# Altium PCB Ethernet.PcbDoc
Units mil, origin at the board's own origin, x right, y up, seen from the top; angles counter-clockwise.
Board outline 1020 x 1675 mil, 2 copper layers (Top Layer, Bottom Layer); 17 components, 15 nets, 62 pads, 2 vias.
Unrouted connection lines stored in the file: 1.
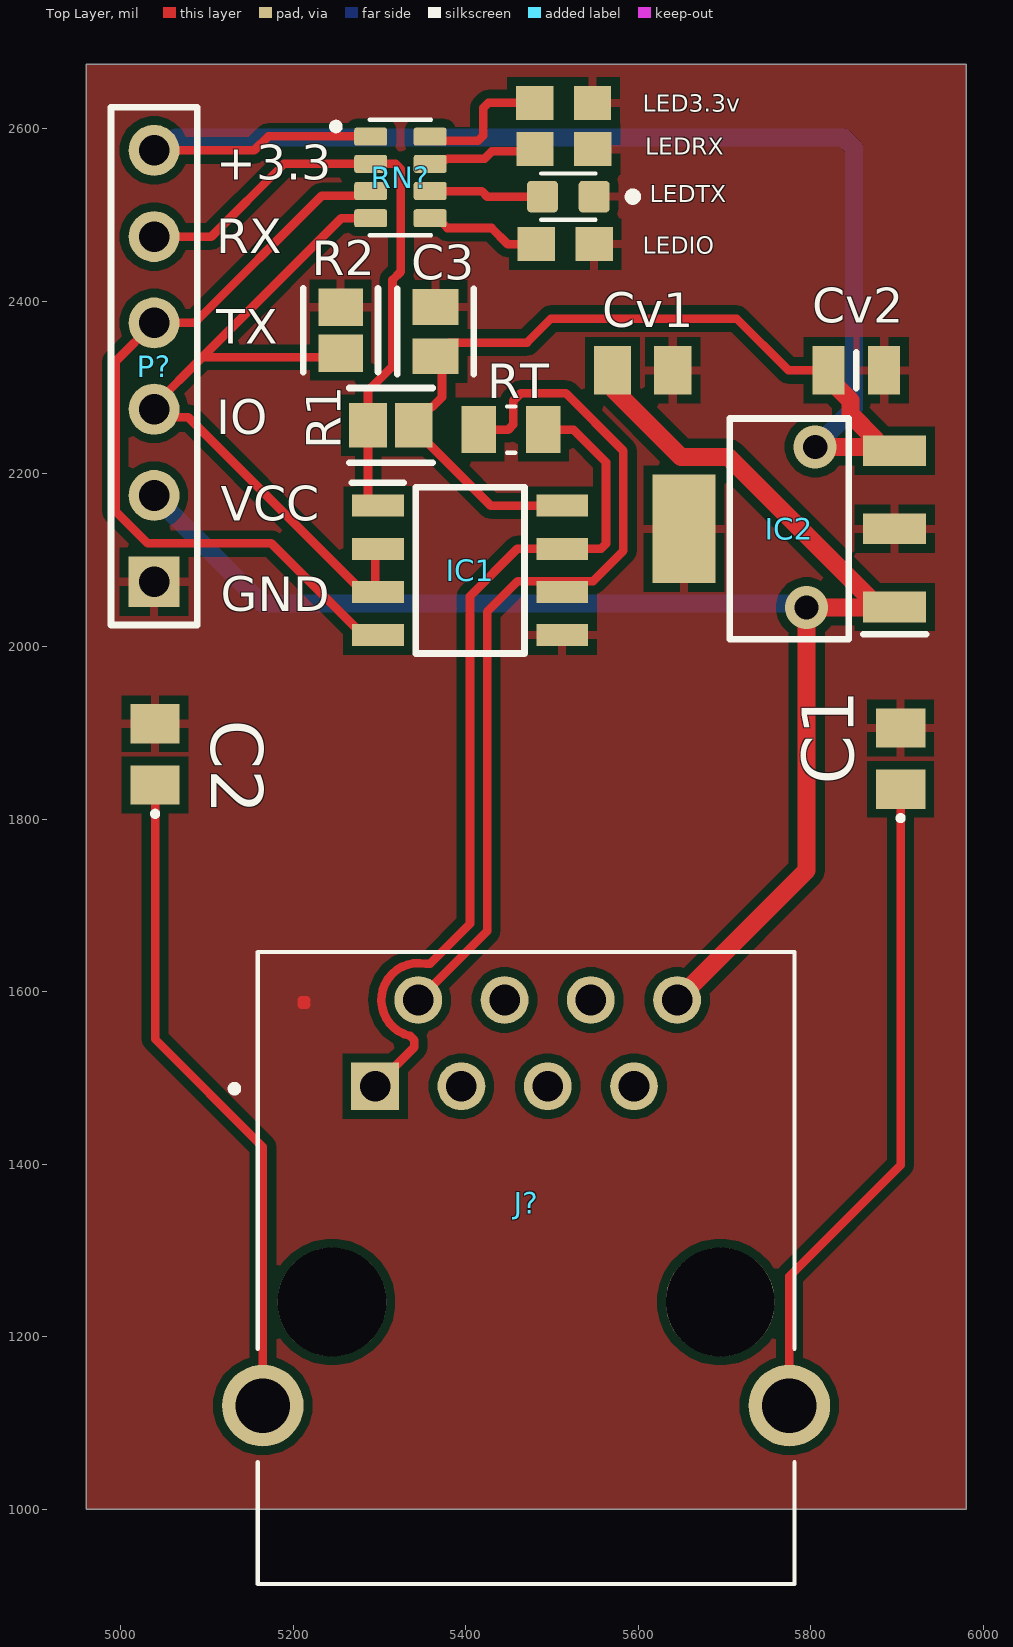
[diagram p0: Top Layer view]
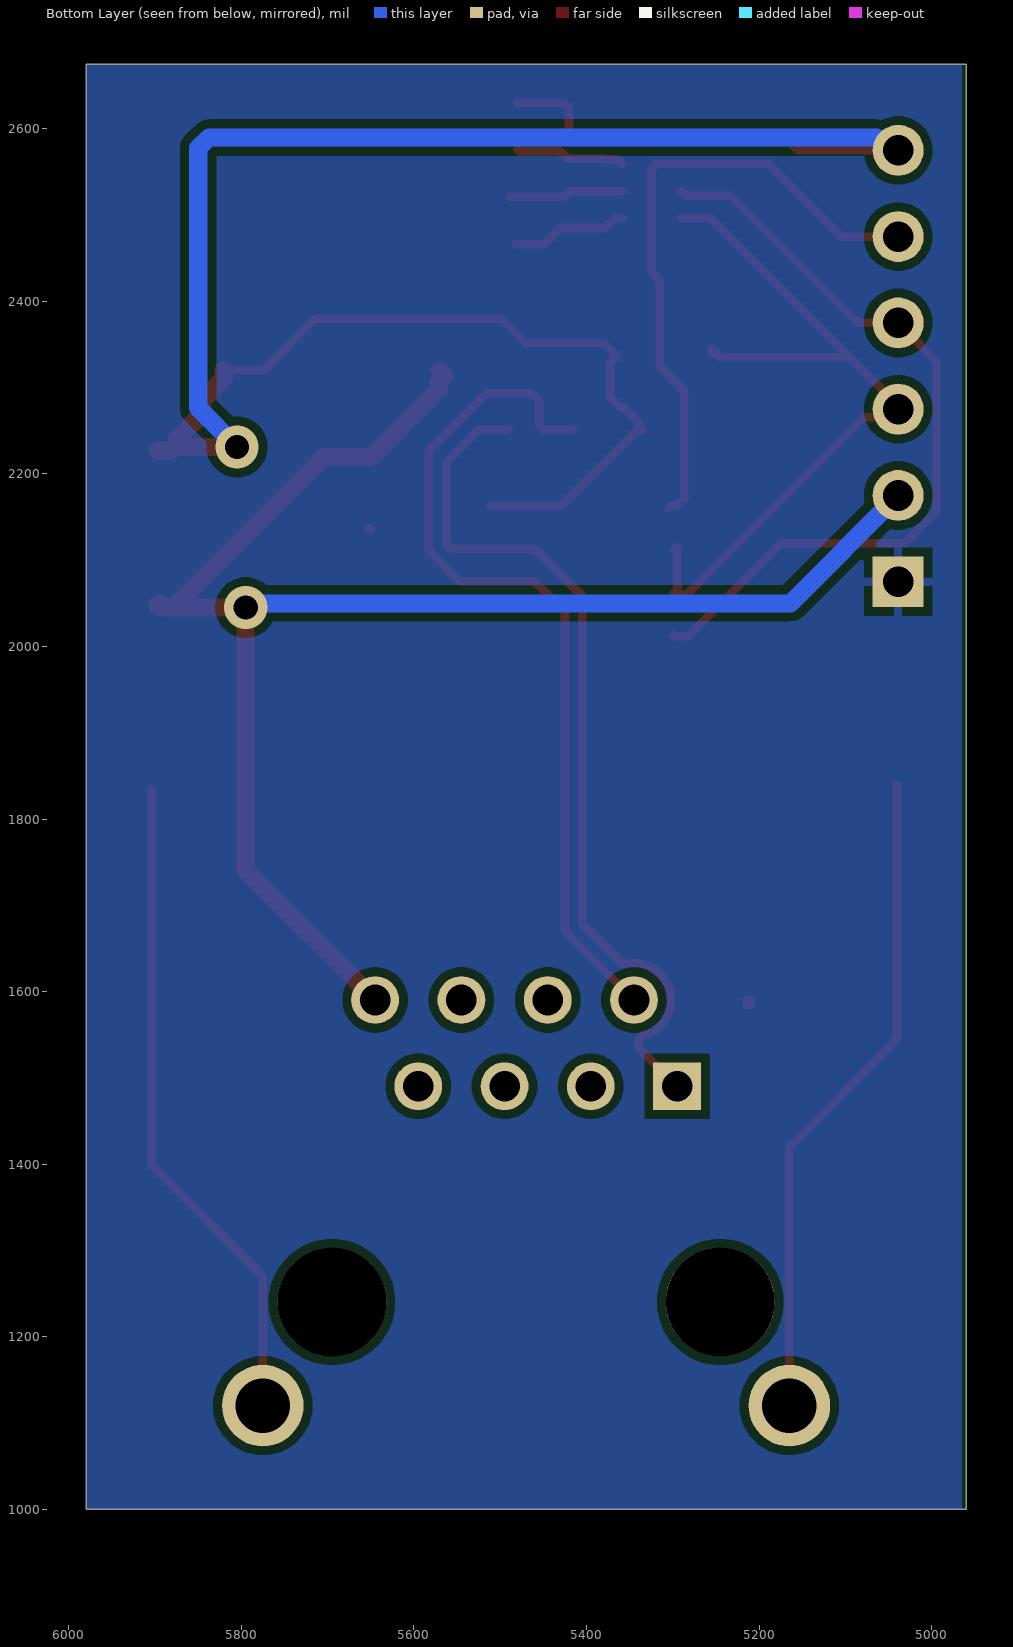
[diagram p1: Bottom Layer view, seen from below]
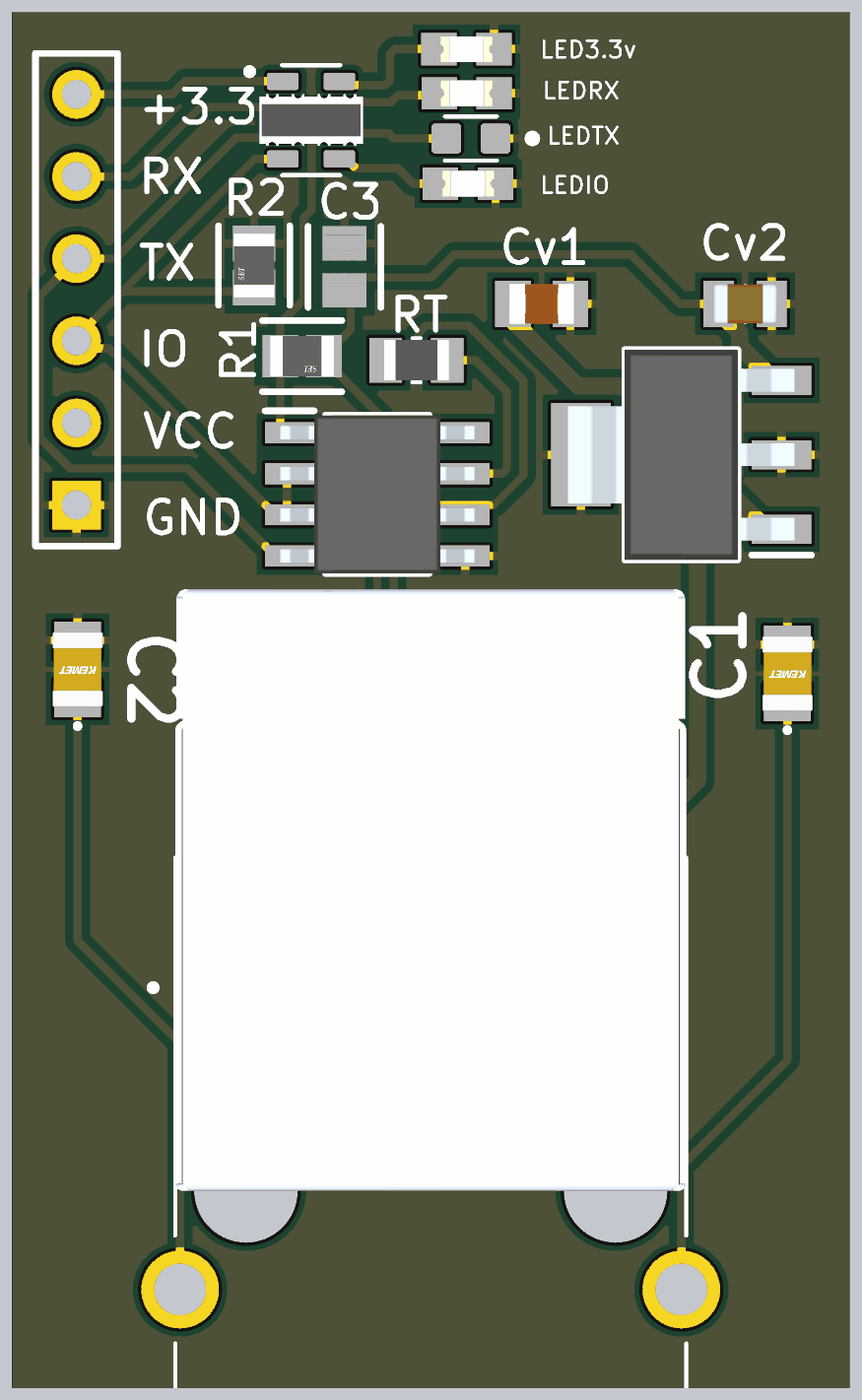
[diagram p2: 3D render of the assembled board from above, using the file's embedded part models]

## Layer stack, top to bottom
Top Solder: solder mask 0.4, Solder Resist, Dk 3.5
Top Layer: signal copper 1.4
Dielectric 1: dielectric 12.6, FR-4, Dk 4.8
Bottom Layer: signal copper 1.4
Bottom Solder: solder mask 0.4, Solder Resist, Dk 3.5

## Board outline
4960,1000 5980,1000 5980,2675 4960,2675

## Design rules (kind name [scope] priority, off if disabled: settings)
Clearance [All] p1: gap=10 ignorepadtopadclearanceinfootprint=FALSE except(0: Arc-Hole Track-Hole SMDPad-Hole THPad-Hole Via-Hole Fill-Hole Poly-Hole Region-Hole Text-Hole)
ComponentClearance [All] p1: gap=0 collisioncheckmode=3 verticalgap=0 showdistances=FALSE
HoleSize [All] p1: absolutevalues=TRUE maxlimit=100 minlimit=10 maxpercent=80.000 minpercent=20.000
PolygonConnect [All] p1: connectstyle=Relief reliefconductorwidth=10 reliefentries=4 polygonreliefangle="90 Angle" airgapwidth=10
RoutingVias [All] p1: holewidth=28 width=50 viastyle="Through Hole" minholewidth=28 minwidth=50 maxholewidth=28 maxwidth=50
SolderMaskExpansion SolderMaskExpansion_Via [IsVia] p1: expansion=4 istentingtop=TRUE
SolderMaskExpansion [All] p2: expansion=4 istentingtop=FALSE
Width [All] p1: maxlimit=21.2 minlimit=10 preferedwidth=10
28 further rules are at their usual default settings.

## Components (designator, comment, footprint, x,y, rotation, side; value= is the part's Value field where it differs from the comment)
C1 "C0805C220J5GAC7210" C0805 5904.07,1870 r90 top
C2 "C0805C220J5GAC7210" C0805 5040,1875 r90 top
C3 "CL21B104KBCNNNC" FP-CL21-IPC_C 5365,2365 r90 top
Cv1 "CL21A106KOQNNNG" CAPC2012X140N#1 5605.04,2320 r0 top value="10 uF"
Cv2 "CL21A226MQQNNNE" CAPC2012X140N#2 5852.72,2320 r180 top value="22 uF"
IC1 "SP3485EN-L" SOIC127P600X175-8N 5405,2088.17 r0 top
IC2 "AZ1117CH2-3.3TRG1" SOT230P700X180-4N 5775,2136.3 r180 top
J? "A-2004-2-4-LPS-N-R" ASSMANN_A-2004-2-4-LPS-N-R 5470,1240.31 r0 top
LED3.3v "LTST-C191KRKT" 0603 5513.46,2630 r180 top value=Red
LEDIO "LTST-C191KSKT" 0603 5515.34,2466.3 r180 top value=Yellow
LEDRX "LTST-C191KGKT" 0603 5513.81,2576.3 r180 top value=Green
LEDTX "LTST-C191TBKT" LEDC1608X65N 5518.89,2521.3 r180 top value=Blue
P? "Header 6" HDR1X6 5038.81,2075 r90 top
R1 "RNCP0805FTD10K0" FP-RNCP0805-IPC_C 5313.37,2256.3 r180 top
R2 "RNCP0805FTD10K0" FP-RNCP0805-IPC_C 5255,2366.63 r90 top
RN? "CAY16-2201F4LF" RESCAF80P320X160X60-8N 5324.36,2543.55 r0 top
RT "RMCF0805JT120R" RESC2012X65N 5452.6,2251.3 r0 top value="120 Ohm"

## Footprints (in the part's own frame and the unit in brackets; to place one, negate y for a bottom-side part, rotate by r counter-clockwise, add the part's x,y. Pads: shape width x height; smd on the part's side, far side on the other; paste and mask are expansions set on the pad)
0603 [mm]
  rect 1.1x1 smd: 1(-0.85,0) 2(0.85,0)
  body extent -0.8,-0.4 0.8,0.4, height 0.55
ASSMANN_A-2004-2-4-LPS-N-R [mm]
  rect 1.408x1.408 hole 0.9: 1(-4.445,6.35)
  round 1.408 hole 0.9: 2(-3.175,8.89) 3(-1.905,6.35) 4(-0.635,8.89) 5(0.635,6.35) 6(1.905,8.89) 7(3.175,6.35) 8(4.445,8.89)
  round 2.4 hole 1.6: S1(-7.75,-3.05) S2(7.75,-3.05)
  round 3.2 hole 3.2 unplated: ""(-5.715,0) ""(5.715,0)
  silkscreen extent -8.69,-8.3 7.9,10.3, body extent -7.9,0 7.9,18.6, height 6.6
C0805 [mm]
  rect 1.15x1.45 smd: 1(-0.9,0) 2(0.9,0)
  silkscreen extent -1.8,-0.05 -1.7,0.05, body extent -1.15,-0.78 1.15,0.77, height 0.98
CAPC2012X140N#1 [mm]
  rect 1.1x1.43 smd: 1(-0.888,0) 2(0.888,0)
  body extent -1,-0.63 1,0.63, height 1.35
CAPC2012X140N#2 [mm]
  rect 0.94x1.43 smd: 1(-0.82,0) 2(0.82,0)
  silkscreen extent 0,-0.53 0,0.53, body extent -1,-0.63 1,0.63, height 1.4
FP-CL21-IPC_C [mil]
  rect 41.52x53.39 smd paste+0 mask+0: 1(-28.57,0) 2(28.57,0)
  silkscreen extent -49,-44 49,44, body extent -53,-32 53,32, height 10
FP-RNCP0805-IPC_C [mil]
  rect 43.52x51.5 smd paste+0 mask+0: 1(-26.63,0) 2(26.63,0)
  silkscreen extent -48,-43 48,43, body extent -52,-31 52,31, height 10
HDR1X6 [mm] "Connector; Header; 6 Position"
  rect 1.5x1.5 hole 0.9: 1(0,0)
  round 1.5 hole 0.9: 2(2.54,0) 3(5.08,0) 4(7.62,0) 5(10.16,0) 6(12.7,0)
  silkscreen extent -1.27,-1.27 13.97,1.27
LEDC1608X65N [mm]
  rrect25% 0.91x0.93 smd: A(0.76,0) C(-0.76,0)
  silkscreen extent -2.02,-0.68 0.8,0.68
RESC2012X65N [mm]
  rect 1.01x1.38 smd: 1(-0.95,0) 2(0.95,0)
  silkscreen extent -0.12,-0.68 0.12,0.68, body extent -1,-0.63 1,0.63, height 0.65
RESCAF80P320X160X60-8N [mm]
  rrect25% 0.97x0.53 smd: 1(-0.875,1.2) 2(-0.875,0.4) 3(-0.875,-0.4) 4(-0.875,-1.2) 5(0.875,-1.2) 6(0.875,-0.4) 7(0.875,0.4) 8(0.875,1.2)
  silkscreen extent -2,-1.7 0.9,1.7, body extent -1.6,-0.8 1.6,0.8, height 0.6
SOIC127P600X175-8N [mm]
  rect 1.525x0.65 smd: 1(-2.712,1.905) 2(-2.712,0.635) 3(-2.712,-0.635) 4(-2.712,-1.905) 5(2.712,-1.905) 6(2.712,-0.635) 7(2.712,0.635) 8(2.712,1.905)
  silkscreen extent -3.47,-2.45 1.6,2.58, body extent -3,-2.45 3,2.45, height 1.75
SOT230P700X180-4N [mm]
  rect 1.85x0.9 smd: 1(-3.1,2.3) 2(-3.1,0) 3(-3.1,-2.3)
  rect 1.85x3.2 smd: 4(3.1,0)
  silkscreen extent -4.03,-3.25 1.75,3.25, body extent -3.5,-3.25 3.5,3.25, height 1.8

## Part data
C1 C2: "Capacitor 22 pF", Capacitance="22 pF", Manufacturer_Name=KEMET, Mouser Part Number=80-C0805C220J5GACLR, Arrow Part Number=C0805C220J5GAC7210, Arrow Price/Stock=https://www.arrow.com/en/products/c0805c220j5gac7210/kemet-corporation, Datasheet Link=https://content.kemet.com/datasheets/KEM_C1003_C0G_SMD.pdf, Height=1.1mm, Manufacturer_Part_Number=C0805C220J5GAC7210, Mouser Price/Stock=https://www.mouser.co.uk/ProductDetail/KEMET/C0805C220J5GAC7210?qs=4DgSOGFclrNgR2ux5VsGDQ%3D%3D
C3: library part CMP-2000-05017-2, "CL21 Series 0805 100nF 50V ±10% Tolerance X7R Multilayer Ceramic Chip Capacitor", Capacitance=100nF, Case Code (Imperial)=0805, Case Code (Metric)=2012, Dielectric=X7R, Max Operating Temperature=125°C, Min Operating Temperature=-55°C, Tolerance=10%, Voltage=50V, Case/Package=0805, Contact Plating=Tin, Depth=1.25mm, Height=0.85mm, Lead Free="Lead Free", Length=2mm, Material=Ceramic, Mount="Surface Mount", Packaging="Tape and Reel", Radiation Hardening=No, Thickness=0.037inch, Voltage Rating=50V, Voltage Rating (DC)=50V, Width=0.049inch
Cv1: Package=None, Availability=Unavailable, MF="{'manufacturer': u'Samsung Electro-Mechanics'}", MP=CL21A106KOQNNNG, Price=None
Cv2: "Capacitor", Manufacturer_Name=SAMSUNG, Mouser Part Number=187-CL21A226MQQNNNE, Arrow Part Number=CL21A226MQQNNNE, Arrow Price/Stock=https://www.arrow.com/en/products/cl21a226mqqnnne/samsung-electro-mechanics?region=nac, Datasheet Link=http://product.samsungsem.com/mlcc/basic-search.do?partNumber=CL21A226MQQNNN, Height=1.4mm, Manufacturer_Part_Number=CL21A226MQQNNNE, Mouser Price/Stock=https://www.mouser.co.uk/ProductDetail/Samsung-Electro-Mechanics/CL21A226MQQNNNE?qs=349EhDEZ59oZnQF%252BO1HZ%252BQ%3D%3D
IC1: "Integrated Circuit", Manufacturer_Name=EXAR, Mouser Part Number=701-SP3485EN-L, Arrow Part Number=SP3485EN-L, Arrow Price/Stock=https://www.arrow.com/en/products/sp3485en-l/exar, Datasheet Link=https://datasheet.datasheetarchive.com/originals/distributors/Datasheets-DGA14/1190127.pdf, Height=1.75mm, Manufacturer_Part_Number=SP3485EN-L, Mouser Price/Stock=https://www.mouser.com/Search/Refine.aspx?Keyword=701-SP3485EN-L
IC2: "Integrated Circuit", Manufacturer_Name="Diodes Inc.", Mouser Part Number=621-AZ1117CH2-33TRG1, Arrow Part Number=AZ1117CH2-3.3TRG1, Arrow Price/Stock=https://www.arrow.com/en/products/az1117ch2-3.3trg1/diodes-incorporated?region=nac, Datasheet Link=https://www.arrow.com/en/products/az1117ch2-3.3trg1/diodes-incorporated, Height=1.8mm, Manufacturer_Part_Number=AZ1117CH2-3.3TRG1, Mouser Price/Stock=https://www.mouser.co.uk/ProductDetail/Diodes-Incorporated/AZ1117CH2-3.3TRG1?qs=lQAVKuKFhkLc7jCxso2G3w%3D%3D
J?: "Jack Modular Connector 8p8c (RJ45, Ethernet) 90Â° Angle (Right) Shielded", Package=None, Availability=Unavailable, MF="{'manufacturer': u'Assmann WSW'}", MP=A-2004-2-4-LPS-N-R, Price=None
LED3.3v LEDIO LEDRX: "http://octopart.com/ltst-c190krkt-lite-on-549893", Package=None, Availability=Unavailable, Price=None
  LED3.3v: MF="{'manufacturer': u'Lite-On Electronics'}", MP=LTST-C191KRKT
  LEDIO: MF="{'manufacturer': u'Lite-On Inc.'}", MP=LTST-C191KSKT
  LEDRX: MF="{'manufacturer': u'Lite-On Inc.'}", MP=LTST-C191KGKT
LEDTX: "LED SMD 0603 Blue 30mcd 130deg", Package=None, Availability=Unavailable, MF="{'manufacturer': u'Lite-On Electronics'}", MP=LTST-C191TBKT, Price=None
P?: "Header, 6-Pin", LatestRevisionDate=17-Jul-2002, LatestRevisionNote="Re-released for DXP Platform.", Publisher="Altium Limited"
R1 R2: library part CMP-26527-007436-1, "10kΩ ±1% 0.25W 0805 High Power Anti-Sulfur Thin Film Chip Resistor", Case Code (Imperial)=0805, Case Code (Metric)=2012, Max Operating Temperature=155°C, Max Power Dissipation=250mW, Min Operating Temperature=-55°C, Resistance=10kR, Resistor Type="Thin Film", Temperature Coefficient=100ppm/°C, Tolerance=1%, Case/Package=0805, Features="Moisture Resistant", Height=0.024inch, Lead Free="Lead Free", Length=0.079inch, Mount="Surface Mount", Number of Terminations=2, Packaging="Tape and Reel", RoHS Compliant=Yes, Series=RNCP, Width=0.049inch
RN?: "Res Thick Film Array 75 Ohm 5% 0.25W(1/4W) ?200ppm/C ISOL Molded 8-Pin 1206(4 X 0603) Convex SMD T/R", Package=None, Availability=Unavailable, MF="{'manufacturer': u'Bourns'}", MP=CAY16-2201F4LF, Price=None
RT: "120 Ohm", Package=None, Availability=Unavailable, MF="{'manufacturer': u'Stackpole Electronics Inc'}", MP=RMCF0805JT120R, Price=None, Supplier 1="Arrow Electronics", Supplier Part Number 1=RMCF0805JT120R

## Via types
v1: diameter 50, hole 28, Top Layer to Bottom Layer, tented top, 2 vias

## Nets (pads, with @x,y where several pads share a name; then routed paths per layer and width w, separated by ;. In a path a pad name is that pad's centre, name@x,y a point inside that pad or via, vN(x,y) a via of type N, cw(c..) or ccw(c..) an arc to the next point about the centre after c; other vN are vias at no path point)
+3.3: C3.1 Cv2.2 IC1.8 IC2.3 P?.6 R1.1 RN?.1 | length 2469.5
  Top Layer w10: P?.6 5155,2575 5171.3,2591.3 5289.4,2591.3 RN?.1 ; IC1.8 5429.15,2163.17 5341.01,2251.3 5335,2251.3 R1.1 5340,2260.3 5356.76,2277.06 5360.75,2277.06 5372.49,2288.8 5372.49,2328.93 C3.1 5380.76,2352.19 5470.98,2352.19 5498.79,2380 5713.95,2380 5773.95,2320 Cv2.2
  Top Layer w21.2: v1(5805,2231.3) IC2.3@5877.67,2231.3 ; Cv2.2 5820.43,2310.35 5845.9,2284.89 5845.9,2269.1 5875,2240 5875,2233.97 IC2.3@5877.67,2231.3 ; IC2.3 5882.12,2226.86 IC2.3@5877.67,2231.3
  Bottom Layer w21.2: P?.6 5049.05,2575 5064.05,2590 5837.58,2590 5850,2577.58 5850,2276.3 v1(5805,2231.3)
+5: J?.7
GND: C1.2 C2.2 C3.2 Cv1.2 Cv2.1 IC1.5 IC2.2 IC2.4 LED3.3v.1 LEDIO.1 LEDRX.1 LEDTX.C P?.1 R2.2 | length 18
  Top Layer w10: 5215,1585 5210,1585 5210,1590 5215,1590 ; IC2.4@5650,2136.3 IC2.4
NetC1_1: C1.1 J?.S2 | length 767.9
  Top Layer w10: J?.S2 5775.12,1270.12 5904.07,1399.07 C1.1 C1.1@5903.95,1834.45
NetC2_1: C2.1 J?.S1 | length 771.2
  Top Layer w10: C2.1@5040.12,1839.45 C2.1 5040,1544.95 5164.88,1420.07 J?.S1
NetIC1_1: IC1.1 P?.5 R1.2 RN?.2 | length 744.3
  Top Layer w10: P?.5 5105,2475 5189.3,2559.3 RN?.2 5318.86,2559.3 5324.71,2553.44 5324.71,2434.23 5315.22,2424.74 5315.22,2324.87 5286.74,2296.39 R1.2 5286.74,2170.96 5294.54,2163.17 IC1.1 5301.83,2163.17 IC1.1@5305,2160
NetIC1_2: IC1.2 IC1.3 P?.3 R2.1 RN?.4 | length 925.9
  Top Layer w10: R2.1 5255,2345 5245.24,2335.24 5094.76,2335.24 ; RN?.4 5255.82,2496.3 5094.76,2335.24 ; IC1.2 5296.83,2113.17 5295,2115 5295,2065 5300,2060 5284.17,2060 5078.56,2265.61 5048.2,2265.61 P?.3 5038.81,2279.3 5094.76,2335.24
NetIC1_4: IC1.4 P?.4 RN?.3 | length 916.6
  Top Layer w10: RN?.3 5284.48,2522.37 5233.16,2522.37 5085.79,2375 P?.4 4994.28,2330.47 4994.28,2156.56 5031.31,2119.53 5174.64,2119.53 5282.4,2011.77 5298.23,2011.77 IC1.4
NetIC1_6: IC1.6 J?.2 RT.1 | length 1014.8
  Top Layer w10: J?.2 5425,1670.31 5425,2040.42 5460.16,2075.58 5547.49,2075.58 5582.65,2110.74 5582.65,2226.92 5516.1,2293.47 5463.9,2293.47 5455.12,2284.68 5455.12,2257.16 5449.26,2251.3 RT.1
NetIC1_7: IC1.7 J?.1 RT.2 | length 1026
  Top Layer w10: J?.1 5340.25,1535.56 5340.25,1539.66 ccw(c5330.25,1539.7) 5340.25,1539.75 5340.25,1543.85 5337.35,1546.75 ccw(c5330.25,1539.7) 5337.29,1546.81 5335.4,1548.69 cw(c5345,1590.31) 5353.49,1632.18 5354.44,1632.18 5358.58,1632.18 5405,1678.6 5405,2043.29 ; 5405,2045.56 5405,2058.35 5459.81,2113.17 IC1.7 5556.79,2113.17 5562.65,2119.02 5562.65,2213.54 5524.88,2251.3 RT.2
NetLED3.3v_2: LED3.3v.2 RN?.8 | length 159.9
  Top Layer w10: RN?.8 5363.3,2586.3 5414.46,2586.3 5420.31,2592.16 5420.31,2624.14 5426.17,2630 LED3.3v.2
NetLEDIO_2: LEDIO.2 RN?.5 | length 135.5
  Top Layer w10: RN?.5 5367.47,2496.3 5378.78,2485 5430,2485 5448.7,2466.3 LEDIO.2
NetLEDRX_2: LEDRX.2 RN?.7 | length 128.6
  Top Layer w10: RN?.7 5364.24,2564.73 5378.13,2564.73 5378.76,2565.36 5421.8,2565.36 5430.42,2573.98 5478.02,2573.98 LEDRX.2
NetLEDTX_A: LEDTX.A RN?.6 | length 132.8
  Top Layer w10: RN?.6 5418.51,2527.8 5425.01,2521.3 LEDTX.A
VCC: Cv1.1 IC2.1 J?.8 P?.2 | length 1876.4
  Top Layer w21: Cv1.1 5564.08,2314 5571.23,2306.85 5571.23,2297.98 5649.42,2219.8 5704.3,2219.8 IC2.1@5878.72,2045.38 ; J?.8 5645,1595 5650,1600 5654.69,1600 5795,1740.31 v1(5795,2045) 5795.38,2045.38 IC2.1@5878.72,2045.38 ; IC2.1 5897.05,2047.95 5895,2050 5890.38,2045.38 IC2.1@5878.72,2045.38
  Bottom Layer w21: P?.2 5163.81,2050 5790,2050 v1(5795,2045)
pads on no net: J?. J?.3 J?.4 J?.5 J?.6

## Polygon pours and split planes (outlines as drawn)
GND on Bottom Layer "GND_L02_P001" (solid, pour order 1): 4965,2675 4965,1000 5980,1000 5980,2675
GND on Top Layer "GND_L01_P000" (solid, pour order 0): 4961.07,2675 5980,2675 5980,1000 4961.07,1000

## Silkscreen, mask and mechanical layers (free items; w line width, h text height)
Top Overlay:
  text "+3.3" at 5111,2541 h40
  text "RX" at 5111,2456 h40
  text "TX" at 5111,2351 h40
  text "IO" at 5111,2246 h40
  text "VCC" at 5116,2146 h40
  text "GND" at 5116,2041 h40